# Altium PCB PCB1.PcbDoc (part 2 of 2)
Units mm, origin at the board's own origin, x right, y up, seen from the top; angles counter-clockwise.
Board outline 152.4 x 101.6 mm, 4 copper layers (Top Layer, Layer 1, Layer 2, Bottom Layer), stack 0.603 mm thick; 81 components, 109 nets, 446 pads, 110 vias.
Unrouted connection lines stored in the file: 160.
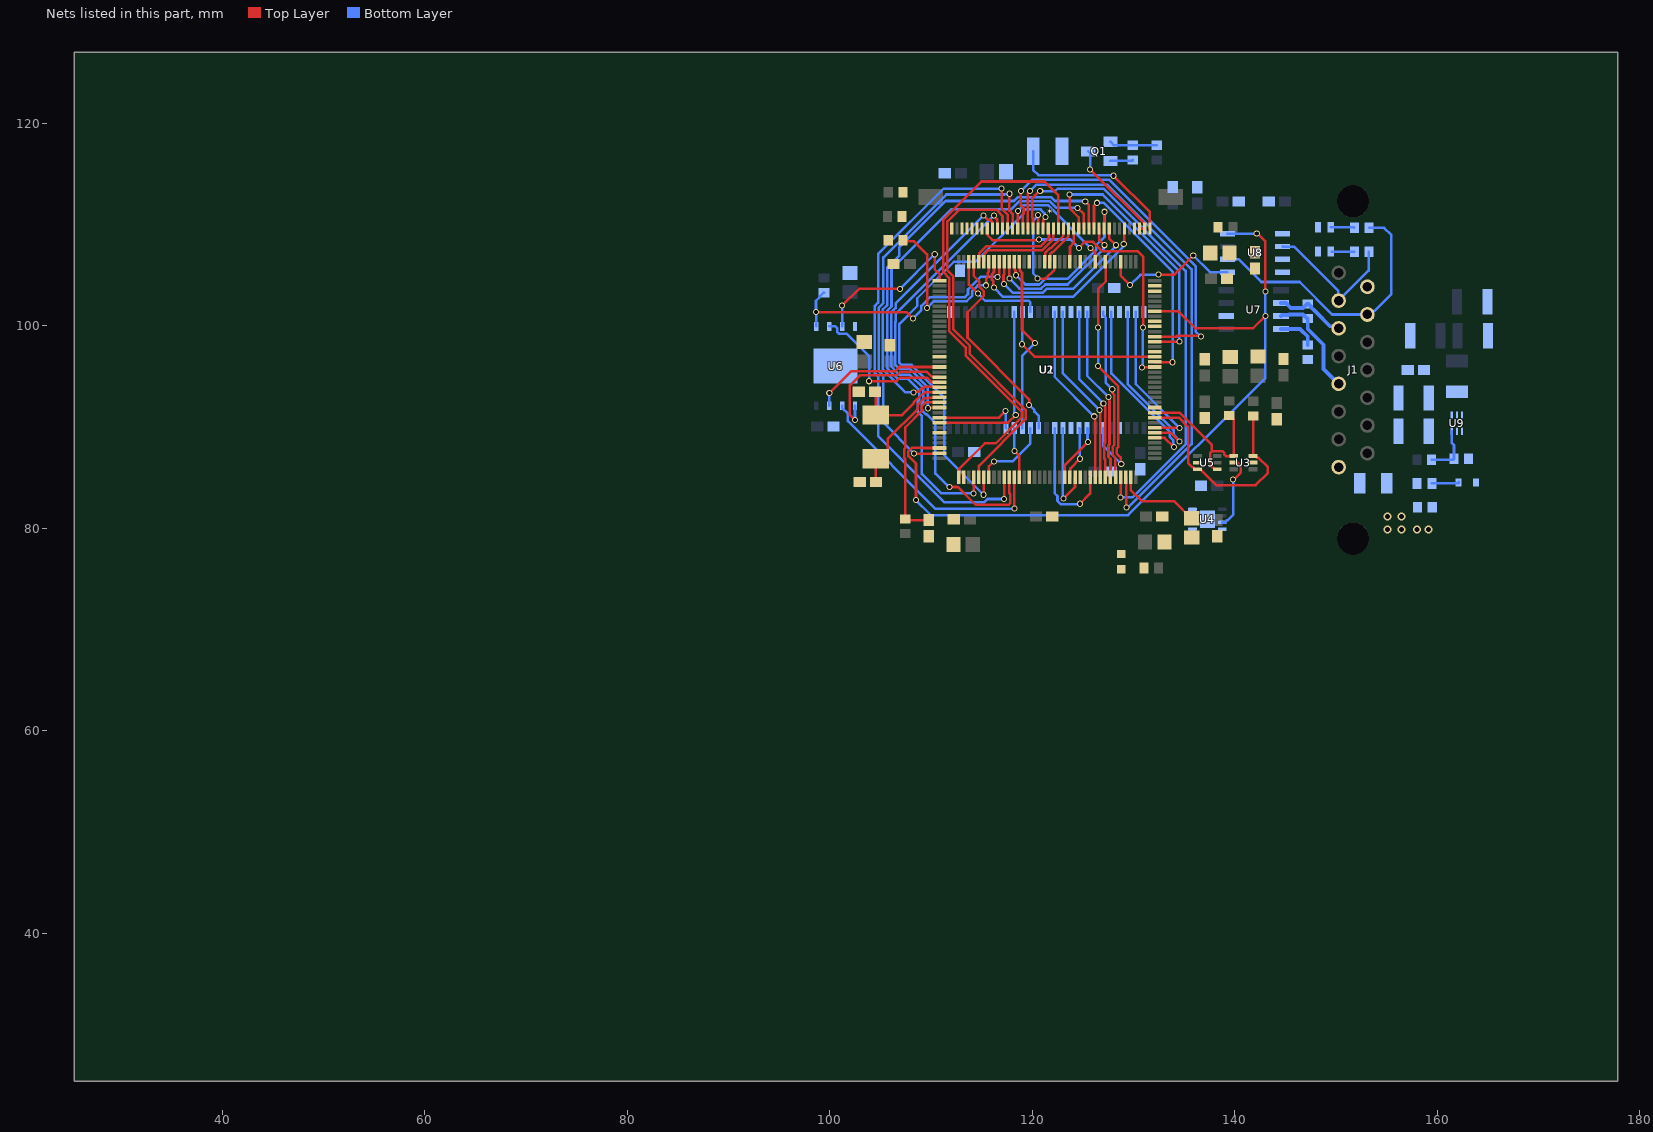
[diagram p2: the nets of this part, all layers, seen from the top]

## Via types
v1: diameter 0.6, hole 0.4, Top Layer to Bottom Layer, 104 vias
v2: diameter 0.8, hole 0.5, Top Layer to Bottom Layer, 6 vias

## Nets (pads, with @x,y where several pads share a name; then routed paths per layer and width w, separated by ;. In a path a pad name is that pad's centre, name@x,y a point inside that pad or via, vN(x,y) a via of type N, cw(c..) or ccw(c..) an arc to the next point about the centre after c; other vN are vias at no path point) (continued)
FMC_D3: U1.115 U2.6 | length 25.6
  Top Layer w0.254: v1(126.492,96.012) 128.489,94.015 128.489,88.03 128.328,87.869 128.328,87.391 128.712,87.007 128.712,86.426 v1(128.778,86.36) ; v1(126.492,99.822) 126.492,103.632 127.254,104.394 127.254,106.263 U1.115@127.215,106.302
  Bottom Layer w0.254: v1(126.492,96.012) v1(126.492,99.822) ; U2.6@127.012,89.891 127.012,88.126 v1(128.778,86.36)
FMC_D4: U1.58 U2.8 | length 5.8
  Top Layer w0.254: U1.58@123.215,85.052 123.215,86.258 v1(125.476,88.519)
  Bottom Layer w0.254: U2.8@125.412,89.891 125.444,89.859 125.444,88.551 v1(125.476,88.519)
FMC_D5: U1.59 U2.9 | length 5.3
  Top Layer w0.254: U1.59@123.715,85.052 123.763,85.1 123.763,85.917 v1(124.714,86.868)
  Bottom Layer w0.254: U2.9@124.612,89.891 124.663,89.84 124.663,86.919 v1(124.714,86.868)
FMC_D6: U1.60 U2.11 | length 9.6
  Top Layer w0.254: v1(123.063,82.931) 124.215,84.083 U1.60@124.215,85.052
  Bottom Layer w0.254: U2.11@123.012,89.891 123.012,82.982 v1(123.063,82.931)
FMC_D7: U1.63 U2.12 | length 12.8
  Top Layer w0.254: v1(124.714,82.423) 125.715,83.424 U1.63@125.715,85.052
  Bottom Layer w0.254: U2.12@122.212,89.891 122.212,83.444 122.486,83.17 122.486,82.692 122.824,82.354 124.551,82.354 124.62,82.423 v1(124.714,82.423)
FMC_D8: U1.64 U2.39 | length 18
  Top Layer w0.254: v1(126.111,91.059) 126.111,90.965 126.215,90.861 U1.64@126.215,85.052
  Bottom Layer w0.254: U2.39@122.212,101.371 122.212,94.958 v1(126.111,91.059)
FMC_D9: U1.65 U2.40 | length 17.9
  Top Layer w0.254: v1(126.619,91.694) 126.619,91.6 126.715,91.504 126.715,88.541 126.712,88.538 126.712,86.722 126.715,86.719 U1.65@126.715,85.052
  Bottom Layer w0.254: U2.40@123.012,101.371 123.012,95.301 v1(126.619,91.694)
FMC_D10: U1.66 U2.42 | length 17.5
  Top Layer w0.254: v1(127.005,92.337) 127.005,92.243 127.215,92.033 127.215,88.47 127.116,88.371 127.116,86.889 127.215,86.79 U1.66@127.215,85.052
  Bottom Layer w0.254: U2.42@124.612,101.371 124.612,94.73 v1(127.005,92.337)
FMC_D11: U1.67 U2.43 | length 17.4
  Top Layer w0.254: v1(127.508,92.964) 127.574,92.898 127.574,92.584 127.619,92.539 127.619,88.303 127.52,88.204 127.52,87.056 127.715,86.861 U1.67@127.715,85.052
  Bottom Layer w0.254: U2.43@125.412,101.371 125.412,95.06 v1(127.508,92.964)
FMC_D12: U1.68 U2.45 | length 17
  Top Layer w0.254: v1(127.889,93.726) 127.955,93.66 127.955,93.333 128.085,93.203 128.085,88.197 127.924,88.036 127.924,87.224 128.167,86.981 128.167,85.1 U1.68@128.215,85.052
  Bottom Layer w0.254: U2.45@127.012,101.371 127.012,101.028 127.254,100.786 127.254,94.361 v1(127.889,93.726)
FMC_D13: U1.77 U2.46 | length 18.2
  Top Layer w0.254: U1.77@132.09,88.927 133.069,88.927 v1(133.985,88.011)
  Bottom Layer w0.254: U2.46@127.812,101.371 127.812,95.264 133.57,89.506 133.57,89.028 133.919,88.679 133.919,88.077 v1(133.985,88.011)
FMC_D14: U1.78 U2.48 | length 17.8
  Top Layer w0.254: U1.78@132.09,89.427 133.712,89.427 134.551,88.588 v1(134.551,88.554)
  Bottom Layer w0.254: U2.48@129.412,101.371 129.412,94.235 133.974,89.673 133.974,89.195 134.551,88.618 v1(134.551,88.554)
FMC_D15: U1.79 U2.49 | length 15.7
  Top Layer w0.254: U1.79@132.09,89.927 132.103,89.914 134.538,89.914 v1(134.551,89.901)
  Bottom Layer w0.254: U2.49@130.212,101.371 130.212,94.24 v1(134.551,89.901)
FMC_NBL0: U1.141 U2.14 | length 20.4
  Top Layer w0.254: U1.141@114.215,106.302 114.215,104.929 114.75,104.394 114.75,103.872 115.203,103.419 115.203,102.941 113.596,101.333 113.596,98.821 119.688,92.729 v1(119.688,92.167)
  Bottom Layer w0.254: v1(119.688,92.167) 120.197,91.658 120.197,91.534 120.612,91.119 U2.14@120.612,89.891
FMC_NBL1: U1.142 U2.36 | length 10
  Top Layer w0.254: U1.142@113.715,106.302 113.715,104.264 113.738,104.241 113.738,104.068 v1(114.626,103.18)
  Bottom Layer w0.254: v1(114.626,103.18) 115.351,102.455 115.477,102.455 119.663,102.455 119.812,102.306 U2.36@119.812,101.371
FMC_SDCKE0: U1.29 U2.34 | length 18.1
  Top Layer w0.254: U1.29@110.84,90.427 117.605,90.427 v1(118.364,91.186)
  Bottom Layer w0.254: U2.34@118.212,101.371 118.212,91.338 v1(118.364,91.186)
FMC_SDCLK: U1.93 U2.35 | length 16.8
  Top Layer w0.254: v1(118.999,98.171) 120.243,96.927 U1.93@132.09,96.927
  Bottom Layer w0.254: v1(118.999,98.171) 119.005,98.177 119.005,101.365 U2.35@119.012,101.371
FMC_SDNCAS: U1.132 U2.16 | length 17.6
  Top Layer w0.254: U1.132@118.715,106.302 118.763,106.254 118.763,105.436 118.977,105.222 118.977,99.59 v1(120.269,98.298)
  Bottom Layer w0.254: U2.16@119.012,89.891 119.012,97.041 v1(120.269,98.298)
FMC_SDNE0: U1.28 U2.18 | length 8.5
  Top Layer w0.254: U1.28@110.84,90.927 110.845,90.932 116.713,90.932 v1(117.348,91.567)
  Bottom Layer w0.254: v1(117.348,91.567) 117.38,91.535 117.38,89.923 U2.18@117.412,89.891
FMC_SDNRAS: U1.49 U2.17 | length 5
  Top Layer w0.254: v1(118.237,87.63) 118.237,87.623 118.715,87.145 U1.49@118.715,85.052
  Bottom Layer w0.254: U2.17@118.212,89.891 118.225,89.878 118.225,87.642 v1(118.237,87.63)
FMC_SDNWE: U1.43 U2.15 | length 7.6
  Top Layer w0.254: U1.43@115.715,85.052 115.715,86.124 v1(116.205,86.614)
  Bottom Layer w0.254: v1(116.205,86.614) 118.037,86.614 119.812,88.389 U2.15@119.812,89.891
GND: *.4 *.34 *.40 C1.2 C2.2 C3.2 C4.2 C5.1 C6.1 C7.2 C8.2 C9.2 C10.2 C11.1 C12.1 C13.1 C14.1 C15.2 C16.2 C17.2 C18.2 C19.2 C20.2 C21.2 C22.2 C23.2 C24.2 C25.2 C26.2 C27.2 C28.1 C29.2 C30.2 C31.2 C32.2 C33.2 C34.1 C35.2 C36.1 C37.2 C38.2 C39.2 C40.2 C41.2 C42.2 D1.1 D4.2 J1.15 Q1.3 R1.1 R11.1 R15.2 R17.2 R20.2 U1.16 U1.31 U1.38 U1.51 U1.61 U1.83 U1.94 U1.107 U1.120 U1.130 U2.4 U2.10 U2.26 U2.41 U2.47 U2.50 U3.2 U4.4 U4.7 U4.9 U5.2 U6.4 U6.9 U7.2 U8.5 U9.3 U9.4 | length 2.2
  Bottom Layer w0.254: Q1.3@127.719,116.271 129.823,116.271 R20.2@129.921,116.369
I2C4_SCL: R5.1 U1.81 U3.3 U5.3 | length 23
  Top Layer w0.254: U1.81@132.09,90.927 134.464,90.927 135.378,90.013 135.378,86.429 135.772,86.035 135.864,86.035 136.062,85.837 U5.3@136.312,85.837 136.562,85.837 138.14,84.259 142.044,84.259 143.248,85.463 143.248,86.041 142.331,86.958 142.189,86.958 142.016,87.131 U3.3@141.791,87.131 141.799,87.139 R5.1@141.799,91.095
I2C4_SDA: R6.1 U1.82 U3.4 U5.4 | length 16.6
  Top Layer w0.254: U1.82@132.09,91.427 134.535,91.427 137.722,88.24 137.722,87.589 ; U5.4@138.262,85.837 138.012,85.837 137.814,86.035 137.722,86.035 137.56,86.197 137.56,87.427 137.722,87.589 ; R6.1@139.445,91.13 139.52,91.13 139.891,90.758 U3.4@139.891,87.131 139.113,87.131 138.964,87.28 138.964,87.427 138.802,87.589 137.722,87.589
ISO9141_K: J1.7 R12.1 U8.6 | length 14.4
  Bottom Layer w0.254: U8.6@144.71,107.823 144.714,107.819 145.837,107.819 150.219,103.437 150.219,102.505 J1.7@150.243,102.481 153.215,105.453 R12.1@153.215,107.315
ISO9141_LI: U8.8
ISO9141_LO: J1.14 R13.1 U8.2 | length 27.6
  Bottom Layer w0.254: U8.2@139.262,106.553 140.386,106.553 142.623,104.316 146.405,104.316 149.61,101.111 153.435,101.111 153.435,101.14 153.757,101.462 153.786,101.462 155.448,103.124 155.448,108.966 154.745,109.669 R13.1@153.252,109.669
ISO9141_RX: U1.112 U8.1 | length 14.2
  Top Layer w0.254: U1.112@128.715,106.302 128.715,104.954 v1(129.66,104.01) ; v1(132.461,105.052) 132.484,105.029 133.985,105.029 v1(135.89,106.934)
  Bottom Layer w0.254: v1(129.66,104.01) 129.664,104.01 130.683,105.029 132.438,105.029 v1(132.461,105.052) ; v1(135.89,106.934) 137.541,105.283 U8.1@139.262,105.283
ISO9141_TX: U1.34 U1.102 U8.4 | length 78.7
  Top Layer w0.254: v1(108.515,82.809) 108.515,86.376 107.754,87.137 107.754,87.615 108.092,87.953 109.179,87.953 109.205,87.927 U1.34@110.84,87.927 ; U1.102@132.09,101.427 134.435,101.427 136.11,99.753 141.79,99.753 v1(143.002,100.965) ; v1@142.24,109.093 143.002,108.331 v1(143.002,103.378)
  Bottom Layer w0.254: v1@108.458,82.804 109.967,81.295 129.444,81.295 143.002,94.852 v1(143.002,103.378) ; U8.4@139.262,109.093 139.269,109.1 142.15,109.1 v1(142.157,109.107)
ISO15765-4_CAN_N: J1.6 R9.1 U7.6 | length 7.1
  Bottom Layer w0.381: U7.6@144.559,102.235 145.034,102.235 145.515,101.754 146.71,101.754 147.118,102.161 147.268,102.161 147.528,101.902 147.528,101.827 147.853,101.502 147.859,101.502 148.058,101.302 148.058,101.296 149.409,99.945 150.039,99.945 J1.6@150.243,99.741
ISO15765-4_CAN_P: J1.4 R9.2 U7.7 | length 10.6
  Bottom Layer w0.381: U7.7@144.559,100.965 144.668,101.074 145.323,101.074 145.367,101.119 146.71,101.119 147.118,100.711 R9.2@147.193,100.711 147.193,99.684 148.759,98.118 148.759,95.745 J1.4@150.243,94.261
LCD_CS: *.11 U1.134 | length 15.3
  Top Layer w0.254: U1.134@117.715,106.302 117.722,106.295 117.722,104.655 v1(117.729,104.648) ; *.11@126.587,109.601 126.603,109.585 126.603,108.474 v1(127.127,107.95)
  Bottom Layer w0.254: v1(117.729,104.648) 118.71,103.667 120.876,103.667 121.28,104.071 123.492,104.071 127.061,107.639 127.061,107.884 v1(127.127,107.95)
LCD_MOSI: *.9 U1.135 | length 17.6
  Top Layer w0.254: v1(117.199,104.118) 117.152,104.164 117.152,105.008 117.215,105.071 U1.135@117.215,106.302 ; *.9@127.591,109.601 127.591,108.629 v1(128.27,107.95)
  Bottom Layer w0.254: v1(117.199,104.118) 118.053,103.263 121.043,103.263 121.447,103.667 124.041,103.667 128.27,107.896 v1(128.27,107.95)
LCD_NRST: *.6 C29.1 R4.1 U1.137 | length 19.7
  Top Layer w0.254: v1(116.205,103.759) 116.139,103.825 116.139,104.426 115.998,104.567 115.998,105.066 116.215,105.283 U1.137@116.215,106.302 ; v1(129.026,108.071) 129.026,108.165 129.095,108.234 *.6@129.095,109.601
  Bottom Layer w0.254: v1(116.205,103.759) 117.105,102.859 123.995,102.859 129.032,107.896 v1@129.032,108.077
LCD_SPI_CLK: *.10 U1.133 | length 16.9
  Top Layer w0.254: U1.133@118.215,106.302 118.263,106.254 118.263,105.511 118.334,105.44 118.334,105.05 v1(118.4,104.983) ; *.10@127.089,109.601 127.108,109.62 127.108,111.233 v1(127.127,111.252)
  Bottom Layer w0.254: v1(118.4,104.983) 119.312,104.071 120.708,104.071 121.285,104.648 123.498,104.648 126.307,107.457 126.307,107.946 127.127,108.766 v1(127.127,111.252)
LED_A: *.1 R18.1 | length 16.7
  Top Layer w0.254: v1(128.016,114.808) 131.604,111.22 *.1@131.604,109.601
  Bottom Layer w0.254: R18.1@120.086,117.221 120.086,115.372 120.592,114.866 127.958,114.866 v1(128.016,114.808)
LED_K: *.2 *.3 Q1.2 | length 10.4
  Top Layer w0.254: v1(125.705,115.443) 131.102,110.045 *.2@131.102,109.601 *.3@130.6,109.601
  Bottom Layer w0.254: Q1.2@125.519,117.221 125.705,117.035 v1(125.705,115.443)
LTDC_B2: *.16 U1.122 | length 3.4
  Top Layer w0.254: U1.122@123.715,106.302 123.715,107.785 124.079,108.149 *.16@124.079,109.601
LTDC_B3: *.17 U1.126 | length 4.1
  Top Layer w0.254: U1.126@121.715,106.302 121.763,106.35 121.763,107.092 121.925,107.254 121.997,107.254 123.552,108.81 123.552,109.576 *.17@123.577,109.601
LTDC_B4: *.18 U1.127 | length 4.1
  Top Layer w0.254: U1.127@121.215,106.302 121.263,106.35 121.263,107.163 121.758,107.658 121.829,107.658 123.05,108.879 123.05,109.576 *.18@123.076,109.601
LTDC_B5: *.19 U1.37 | length 48.6
  Top Layer w0.254: U1.37@112.715,85.052 112.763,85.1 112.763,85.842 115.315,88.395 116.389,88.395 118.941,90.947 118.941,91.527 113.415,97.053 113.415,97.859 111.792,99.482 111.792,104.717 111.206,105.303 111.206,110.48 114.968,114.242 121.216,114.242 122.549,112.909 122.549,109.626 *.19@122.574,109.601
LTDC_B6: *.20 U1.139 | length 9.3
  Top Layer w0.254: U1.139@115.215,106.302 115.263,106.35 115.263,107.092 115.613,107.442 120.97,107.442 122.072,108.544 *.20@122.072,109.601
LTDC_B7: *.21 U1.140 | length 9.3
  Top Layer w0.254: U1.140@114.715,106.302 114.763,106.35 114.763,107.163 115.446,107.846 120.803,107.846 121.643,108.686 121.643,108.982 121.596,109.029 121.596,109.576 *.21@121.571,109.601
LTDC_CLK: *.12 U1.92 | length 23.7
  Top Layer w0.254: *.12@126.086,109.601 126.086,111.862 v1(126.365,112.141) ; U1.92@132.09,96.427 132.107,96.41 133.841,96.41 v1(133.858,96.393)
  Bottom Layer w0.254: v1(126.365,112.141) 127.054,112.141 133.858,105.337 v1(133.858,96.393)
LTDC_DE: *.13 U1.22 | length 42.9
  Top Layer w0.254: v1(108.249,93.427) 108.315,93.494 108.79,93.494 109.057,93.761 109.142,93.761 109.361,93.98 110.046,93.98 110.05,93.975 110.792,93.975 U1.22@110.84,93.927 ; v1(125.222,112.268) 125.584,111.906 *.13@125.584,109.601
  Bottom Layer w0.254: v1(108.249,93.427) 107.487,93.427 105.249,95.666 105.249,101.629 105.687,102.067 105.687,105.75 106.865,106.928 106.865,107.754 111.427,112.316 118.176,112.316 118.568,112.707 121.862,112.707 122.253,112.316 125.174,112.316 v1(125.222,112.268)
LTDC_G2: *.22 U1.42 | length 44.1
  Top Layer w0.254: v1(115.189,83.312) 115.202,83.325 115.202,85.039 U1.42@115.215,85.052 ; *.22@121.069,109.601 121.069,110.435 121.288,110.654 v1(121.288,110.743)
  Bottom Layer w0.254: v1(115.189,83.312) 111.281,87.22 111.281,92.925 108.067,96.139 107.061,96.139 106.865,96.335 106.865,100.188 108.636,101.959 108.636,102.714 112.241,106.319 114.383,106.319 119.163,111.099 119.163,111.344 119.314,111.495 120.81,111.495 121.222,111.083 121.222,110.809 v1(121.288,110.743)
LTDC_G3: *.23 U1.125 | length 10.8
  Top Layer w0.254: v1(120.496,104.675) 120.521,104.65 121.304,104.65 122.167,105.513 122.167,106.254 U1.125@122.215,106.302 ; v1(120.559,110.918) 120.563,110.914 120.563,109.605 *.23@120.567,109.601
  Bottom Layer w0.254: v1(120.496,104.675) 120.496,104.768 120.082,105.183 120.082,110.359 120.559,110.836 v1(120.559,110.918)
LTDC_G4: *.24 U1.69 | length 49.6
  Top Layer w0.254: *.24@120.066,109.601 120.066,110.607 119.982,110.692 119.982,112.593 120.248,112.859 120.258,112.859 120.683,113.284 v1(120.777,113.284) ; v1(128.709,83.058) 128.712,83.061 128.712,85.049 U1.69@128.715,85.052
  Bottom Layer w0.254: v1(120.777,113.284) 122.26,113.284 122.509,113.533 127.005,113.533 135.128,105.41 135.128,88.279 129.907,83.058 v1(128.709,83.058)
LTDC_G5: *.25 U1.70 | length 52.8
  Top Layer w0.254: *.25@119.564,109.601 119.564,110.929 119.567,110.932 119.567,111.745 119.564,111.747 119.564,113.087 v1(119.761,113.284) ; U1.70@129.215,85.052 129.263,85.004 129.263,84.263 129.286,84.24 v1(129.286,82.042)
  Bottom Layer w0.254: v1(119.761,113.284) 120.414,113.937 127.363,113.937 135.728,105.572 135.728,88.308 129.462,82.042 v1(129.286,82.042)
LTDC_G6: *.26 U1.97 | length 36.9
  Top Layer w0.254: v1(118.872,113.284) 118.872,111.868 119.163,111.577 119.163,111.099 119.062,110.999 *.26@119.062,109.601 ; U1.97@132.09,98.927 132.096,98.933 134.243,98.933 134.312,99.002 136.489,99.002 136.558,98.933 v1(136.652,98.933)
  Bottom Layer w0.254: v1(118.872,113.284) 120.015,114.427 127.581,114.427 136.132,105.876 136.132,99.453 v1(136.652,98.933)
LTDC_G7: *.27 U1.117 | length 12.5
  Top Layer w0.254: *.27@118.561,109.601 118.573,109.614 118.573,111.326 v1(118.586,111.338) ; v1(125.73,107.696) 126.215,107.211 U1.117@126.215,106.302
  Bottom Layer w0.254: v1(118.586,111.338) 119.147,111.899 121.527,111.899 v1(125.73,107.696)
LTDC_HSYNC: *.15 U1.96 | length 27.1
  Top Layer w0.254: v1@123.698,112.903 123.698,111.579 124.581,110.696 *.15@124.581,109.601 ; U1.96@132.09,98.427 132.091,98.426 134.55,98.426 v1(134.551,98.425)
  Bottom Layer w0.254: v1(123.659,112.956) 126.947,112.956 134.493,105.41 134.493,98.483 v1(134.551,98.425)
LTDC_R2: *.28 U1.35 | length 42.1
  Top Layer w0.254: v1(108.331,87.376) 110.047,87.376 110.05,87.379 110.792,87.379 U1.35@110.84,87.427 ; v1(117.729,113.03) 117.729,111.379 118.059,111.049 *.28@118.059,109.601
  Bottom Layer w0.254: v1(108.331,87.376) 105.283,90.424 105.283,95.06 104.845,95.498 104.845,101.796 105.283,102.234 105.283,106.743 111.501,112.961 117.206,112.961 117.209,112.964 117.663,112.964 v1(117.729,113.03)
LTDC_R3: *.29 U1.46 | length 54.8
  Top Layer w0.254: v1(116.967,113.538) 116.967,111.57 117.558,110.979 *.29@117.558,109.601 ; U1.46@117.215,85.052 U1.46@117.215,85.052 117.216,82.89 v1(117.218,82.888)
  Bottom Layer w0.254: v1(116.967,113.538) 111.252,113.538 104.775,107.061 104.775,102.298 104.441,101.964 104.441,95.331 104.775,94.997 104.775,89.103 111.328,82.55 115.243,82.55 115.581,82.888 v1(117.218,82.888)
LTDC_R4: *.30 U1.41 | length 37.8
  Top Layer w0.254: U1.41@114.715,85.052 114.715,86.15 119.345,90.78 119.345,91.694 113.819,97.22 113.819,98.027 112.196,99.65 112.196,104.884 111.61,105.47 111.61,110.313 112.745,111.448 115.966,111.448 115.982,111.465 116.46,111.465 116.798,111.127 116.798,111.094 117.056,110.836 *.30@117.056,109.601
LTDC_R5: *.31 U1.26 | length 27.6
  Top Layer w0.254: v1(109.701,91.85) 109.739,91.889 110.801,91.889 U1.26@110.84,91.927 ; v1(116.221,110.888) 116.221,110.794 116.529,110.486 116.529,109.626 *.31@116.554,109.601
  Bottom Layer w0.254: v1(109.701,91.85) 109.67,91.881 109.67,93.965 107.9,95.735 106.894,95.735 106.461,96.168 106.461,100.355 106.495,100.389 106.495,101.161 v1@116.221,110.887
LTDC_R6: *.32 U1.47 | length 44.9
  Top Layer w0.254: v1(111.817,84.079) 112.644,84.079 114.412,82.311 117.649,82.311 117.798,82.46 117.798,83.39 117.715,83.473 U1.47@117.715,85.052 ; v1(115.189,110.871) 115.585,110.475 115.818,110.475 115.98,110.313 116.027,110.266 116.027,109.626 *.32@116.053,109.601
  Bottom Layer w0.254: v1@111.76,84.074 110.426,85.407 110.426,90.376 109.529,91.273 109.462,91.273 109.124,91.611 109.124,91.678 109.093,91.709 109.093,92.368 109.23,92.505 109.23,93.834 107.91,95.154 106.904,95.154 106.057,96 106.057,101.294 106.495,101.732 106.495,102.177 v1(115.189,110.871)
LTDC_R7: *.33 U1.91 | length 29.7
  Top Layer w0.254: *.33@115.551,109.601 115.576,109.576 115.576,108.936 116.055,108.458 120.599,108.458 v1(120.659,108.518) ; v1(124.587,107.696) 125.164,108.273 125.988,108.273 126.888,107.373 130.386,107.373 130.937,106.822 v1(130.937,99.822) ; v1(130.833,95.88) 130.857,95.904 132.066,95.904 U1.91@132.09,95.927
  Bottom Layer w0.254: v1(120.659,108.518) 123.765,108.518 v1(124.587,107.696) ; v1@130.81,95.885 130.885,95.96 130.885,99.77 v1(130.937,99.822)
LTDC_VSYNC: *.14 U1.40 | length 53.8
  Top Layer w0.254: v1(114.173,83.439) 114.194,83.46 114.194,85.031 U1.40@114.215,85.052 ; v1(124.46,111.633) 125.082,111.011 *.14@125.082,109.601
  Bottom Layer w0.254: v1(114.173,83.439) 111.01,83.439 109.093,85.356 109.093,91.07 108.689,91.474 108.689,92.535 108.826,92.672 108.826,93.666 107.743,94.75 106.736,94.75 105.653,95.833 105.653,101.462 106.091,101.9 106.091,105.583 112.014,111.506 117.938,111.506 118.735,112.303 121.694,112.303 122.364,111.633 v1(124.46,111.633)
NetC13_2: C13.2 U1.106
NetC14_2: C14.2 U1.71 | length 8.5
  Top Layer w0.254: U1.71@129.715,85.052 129.715,83.772 130.81,82.677 134.002,82.677 135.691,80.987 C14.2@135.741,80.987
NetC16_1: C16.1 U1.24 Y1.1 | length 12
  Top Layer w0.254: C16.1@104.556,84.567 104.556,86.849 Y1.1@104.529,86.877 104.879,86.877 105.702,87.7 105.702,88.796 108.689,91.783 108.689,92.242 109.278,92.831 109.737,92.831 109.785,92.879 110.792,92.879 U1.24@110.84,92.927
NetC17_1: C17.1 U1.23 Y1.2 | length 9.6
  Top Layer w0.254: C17.1@104.469,93.487 104.529,93.427 Y1.2@104.529,91.177 107.13,91.177 108.285,92.332 108.285,92.41 109.111,93.235 109.188,93.235 109.38,93.427 U1.23@110.84,93.427
NetD1_2: D1.2 R3.1
NetD2_2: D2.2 R12.2 | length 2.2
  Bottom Layer w0.254: D2.2@149.573,107.315 R12.2@151.802,107.315
NetD3_2: D3.2 R13.2 | length 2.4
  Bottom Layer w0.254: D3.2@149.469,109.728 151.743,109.728 R13.2@151.802,109.669
NetD4_1: D4.1 R14.2 R15.1 U9.5 | length 2.8
  Bottom Layer w0.254: R14.2@159.447,84.428 162.008,84.428 D4.1@162.094,84.514 D4.1@162.094,84.614
NetF1_2: F1.2 J1.1 | length 0
  Bottom Layer w1: J1.1@150.19,86.101 J1.1@150.195,86.095
NetL1_2: L1.2 U9.2
NetQ1_1: Q1.1 R19.1 R20.1 | length 4.7
  Bottom Layer w0.254: Q1.1@127.719,118.171 128.071,117.819 R20.1@129.921,117.819 R19.1@132.275,117.819
NetR1_2: R1.2 U1.138 | length 17.8
  Top Layer w0.254: R1.2@107.219,108.435 107.324,108.331 108.331,108.331 109.617,107.045 v1(109.617,101.73) ; v1(115.443,103.995) 115.443,104.621 115.594,104.772 115.594,105.233 115.715,105.354 U1.138@115.715,106.302
  Bottom Layer w0.254: v1@109.601,101.727 110.295,102.421 113.522,102.421 114.049,102.948 114.049,103.419 114.626,103.995 v1(115.443,103.995)
NetR11_2: R11.2 U7.8 | length 3.8
  Bottom Layer w0.381: U7.8@144.559,99.695 146.431,99.695 147.193,98.933 R11.2@147.193,98.097
NetR16_1: R16.1 R17.1 U9.6 | length 5
  Bottom Layer w0.254: R16.1@159.431,86.782 161.547,86.782 R17.1@161.635,86.87 161.635,88.214 161.425,88.424 U9.6@161.425,89.586
NetU3_5: U3.5 U4.3 | length 7.4
  Top Layer w0.254: v1(139.827,84.836) 139.912,84.836 140.593,85.517 140.593,86.146 140.331,86.408 139.964,86.408 U3.5@139.891,86.481
  Bottom Layer w0.254: U4.3@138.762,80.574 139.012,80.574 139.21,80.772 139.272,80.772 139.827,81.327 v1(139.827,84.836)
QSPI_CLK: U1.48 U6.6 | length 24.9
  Top Layer w0.254: U1.48@118.215,85.052 118.218,85.049 118.218,81.938 v1(118.221,81.935)
  Bottom Layer w0.254: U6.6@101.219,92.088 101.219,91.872 101.779,91.312 101.779,90.572 110.436,81.915 v1@118.237,81.915
QSPI_IO0: U1.20 U6.5 | length 14.7
  Top Layer w0.254: v1(102.489,90.678) 101.984,91.183 101.984,94.108 102.975,95.099 106.61,95.099 106.957,95.446 109.58,95.446 110.05,94.975 110.792,94.975 U1.20@110.84,94.927
  Bottom Layer w0.254: v1(102.489,90.678) U6.5@102.489,92.088
QSPI_IO1: U1.21 U6.2 | length 15.1
  Top Layer w0.254: v1(103.886,94.522) 106.604,94.522 106.952,94.869 109.585,94.869 109.979,94.475 110.792,94.475 U1.21@110.84,94.427
  Bottom Layer w0.254: U6.2@99.949,99.936 100.546,99.936 100.717,99.765 100.717,99.399 100.888,99.228 101.659,99.228 103.886,97.001 v1(103.886,94.522)
QSPI_IO2: U1.1 U6.3 | length 16.1
  Top Layer w0.254: v1(101.219,101.981) 102.87,103.632 v1(106.934,103.632) ; v1(110.363,107.061) 110.363,105.575 110.84,105.098 U1.1@110.84,104.427
  Bottom Layer w0.254: U6.3@101.219,99.936 v1(101.219,101.981) ; v1(106.934,103.632) v1(110.363,107.061)
QSPI_IO3: U1.18 U6.7 | length 13.2
  Top Layer w0.254: v1(99.949,93.345) 102.107,95.503 106.443,95.503 106.867,95.927 U1.18@110.84,95.927
  Bottom Layer w0.254: U6.7@99.949,92.088 v1(99.949,93.345)
QSPI_NCS: R10.1 U1.136 U6.1 | length 25.6
  Top Layer w0.254: v1@98.679,101.346 107.569,101.346 v1(108.204,100.711) ; v1(116.575,104.827) 116.575,104.921 116.715,105.061 U1.136@116.715,106.302
  Bottom Layer w0.254: U6.1@98.679,99.936 98.66,99.955 98.66,101.335 v1(98.641,101.354) 98.641,102.468 99.033,102.86 99.033,102.935 99.356,103.258 R10.1@99.431,103.258 ; v1(108.204,100.711) 109.04,101.547 109.04,101.969 109.896,102.825 113.355,102.825 113.645,103.116 113.645,103.586 114.886,104.827 v1(116.575,104.827)
SPK+: U4.5
SPK-: U4.8
STM32_NRST: C15.1 R2.1 U1.25 | length 16.2
  Top Layer w0.254: C15.1@109.759,80.808 107.56,80.808 R2.1@107.449,80.919 107.449,86.87 107.35,86.97 107.35,87.782 107.449,87.882 107.449,89.972 109.093,91.616 109.093,92.059 109.462,92.427 U1.25@110.84,92.427
TP_INT: *.35
TP_RESET: *.38
TP_SCL: *.37 R7.1 U1.100
TP_SDA: *.36 R8.1 U1.99
VBAT: C24.1 C38.1 C39.1 D2.1 D3.1 F1.1 R14.1 R18.2 U8.7 U9.1
  other v2: 155.067,79.883 156.464,79.883 157.988,79.883 159.131,79.883 155.067,81.153 156.464,81.153
pads on no net: *.7 *.8 *.41 *.42 J1.2 J1.3 J1.5 J1.8 J1.9 J1.10 J1.11 J1.12 J1.13 J1.16 J1.17 U1.2 U1.3 U1.4 U1.5 U1.7 U1.8 U1.9 U1.19 U1.27 U1.36 U1.44 U1.45 U1.73 U1.74 U1.75 U1.76 U1.80 U1.87 U1.88 U1.90 U1.98 U1.101 U1.105 U1.109 U1.111 U1.113 U1.116 U1.118 U1.119 U1.123 U1.124 U1.128 U1.129 U1.143 U2.33 U2.37 U4.2 U7.5

## Polygon pours and split planes (outlines as drawn)
GND on Bottom Layer "GND_L04_P008" (solid, pour order 8): 154.305,88.011 154.305,100.457 157.861,100.457 157.861,88.011
NetL1_2 on Bottom Layer "NETL1_2_L04_P000" (solid, pour order 0): 161.798,90.805 161.798,91.567 160.528,92.837 160.528,94.488 163.322,94.488 163.322,92.837 162.052,91.567 162.052,90.805
VBAT on Bottom Layer (solid, pour order 7): 154.305,79.248 159.766,79.248 159.766,90.17 161.544,90.17 161.544,91.694 159.766,91.694 159.766,96.774 157.988,96.774 157.988,89.408 155.956,87.376 154.305,87.376
NetF1_2 on Bottom Layer "NETF1_2_L04_P004" (solid, pour order 4): 148.844,86.995 148.844,82.423 153.416,82.423 153.416,86.995
GND on Bottom Layer "GND_L04_P003" (solid, pour order 3): 164.211,104.648 164.211,96.901 167.005,96.901 167.005,104.648
3V3 on Bottom Layer "3V3_L04_P002" (solid, pour order 2): 159.893,95.377 159.893,100.711 156.718,100.711 156.718,104.648 163.449,104.648 163.449,95.377

## Silkscreen, mask and mechanical layers (free items; w line width, h text height)
Top Overlay:
  circle w0.25: c121.412,95.631 r25.149

## Text inside footprints (layer, text, board x,y; h text height)
U2: Bottom Overlay "*" at 131.393,89.319 h1 r270; Bottom 3D Body "*" at 130.607,90.551 h1 r270
U8: Bottom Overlay "*" at 138.69,104.877 h1 r180; Bottom 3D Body "*" at 140.056,106.032 h1 r180